# Altium PCB zbook-rf-shields-LORA-P1.PcbDoc
Units mm, origin at the board's own origin, x right, y up, seen from the top; angles counter-clockwise.
Board outline 27.5 x 35.5 mm, 2 copper layers (Top Layer, Bottom Layer), stack 0.97 mm thick; 22 components, 20 nets, 66 pads, 117 vias.
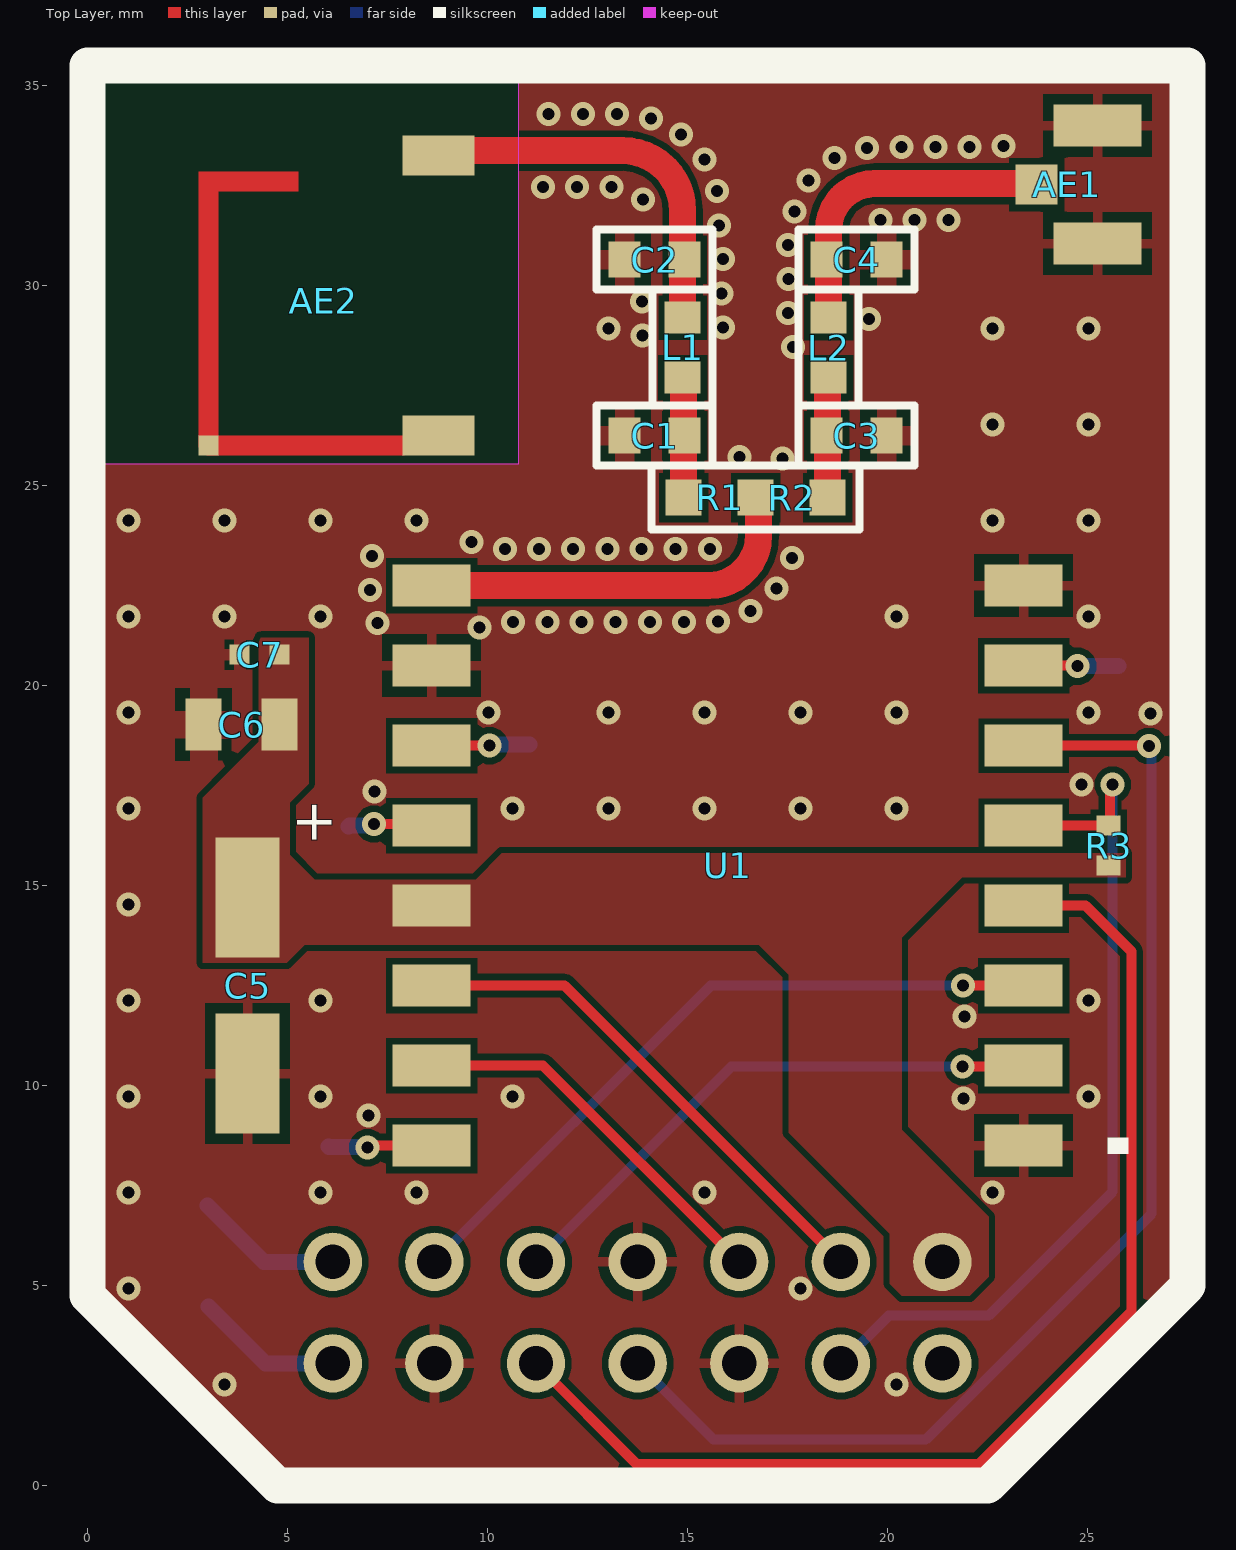
[diagram p0: Top Layer view]
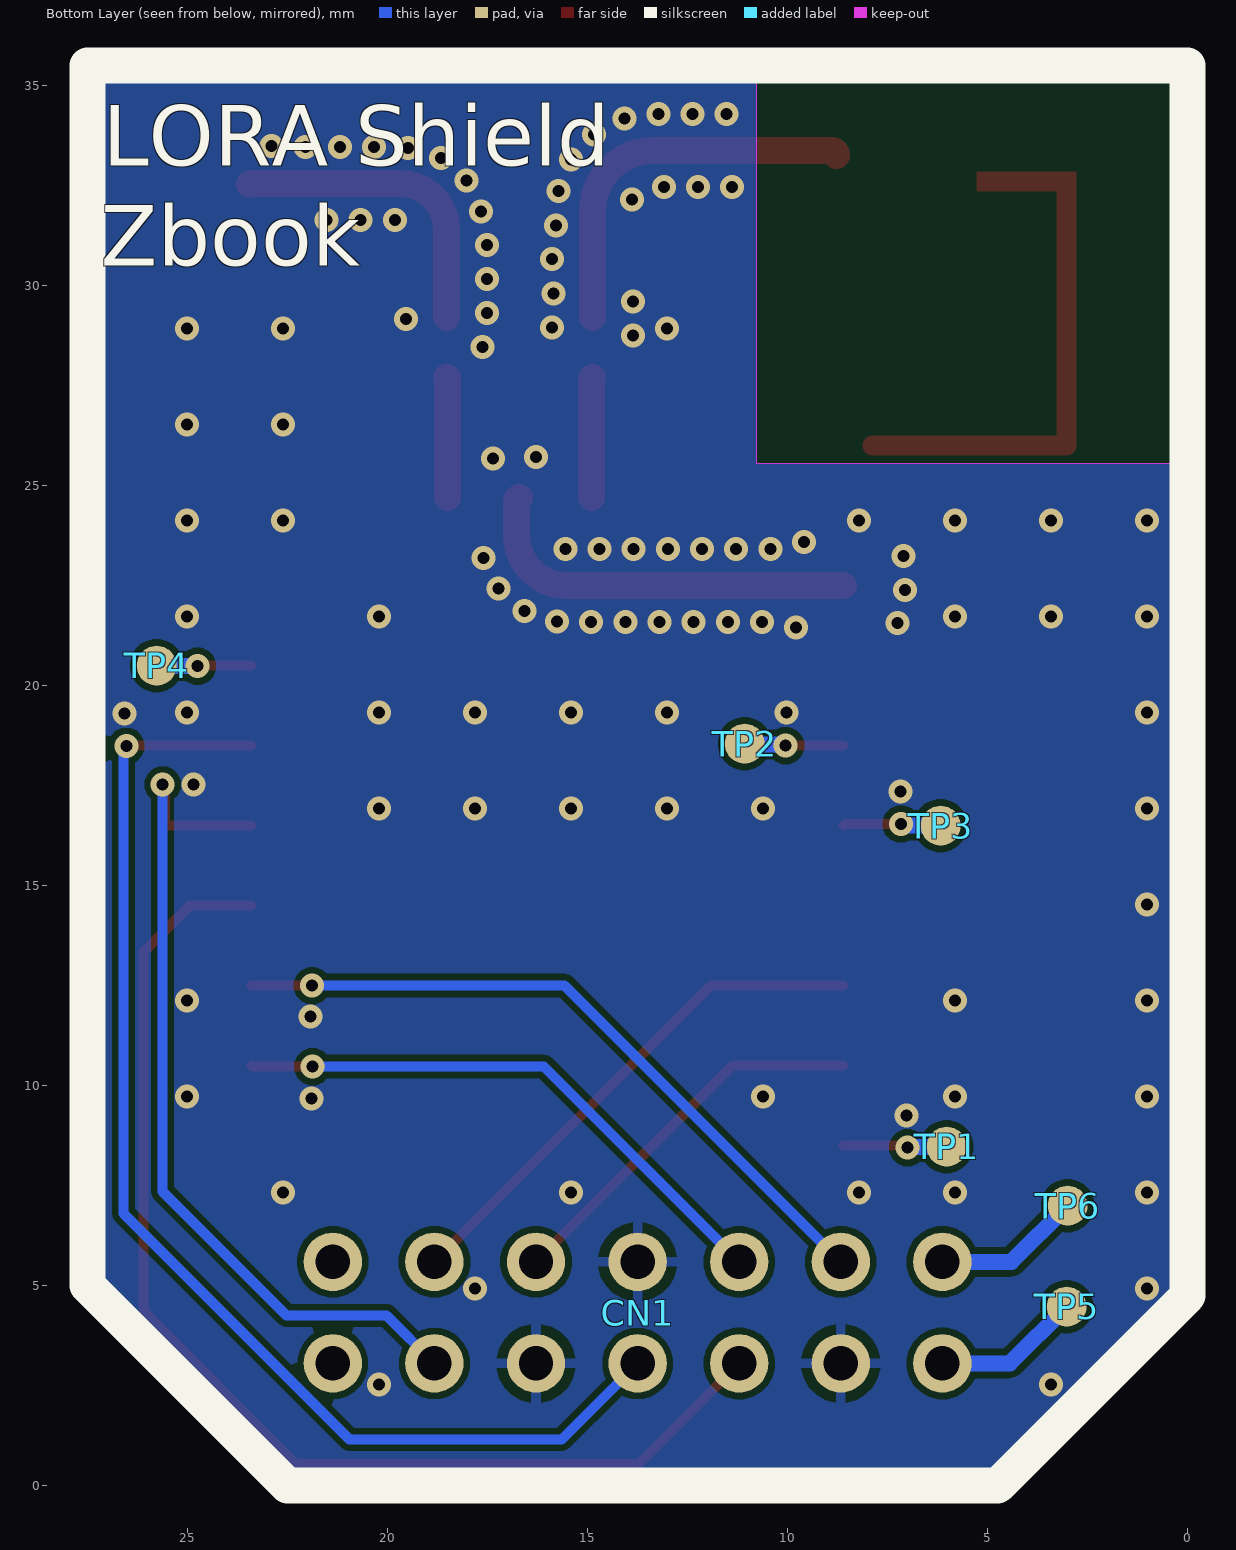
[diagram p1: Bottom Layer view, seen from below]
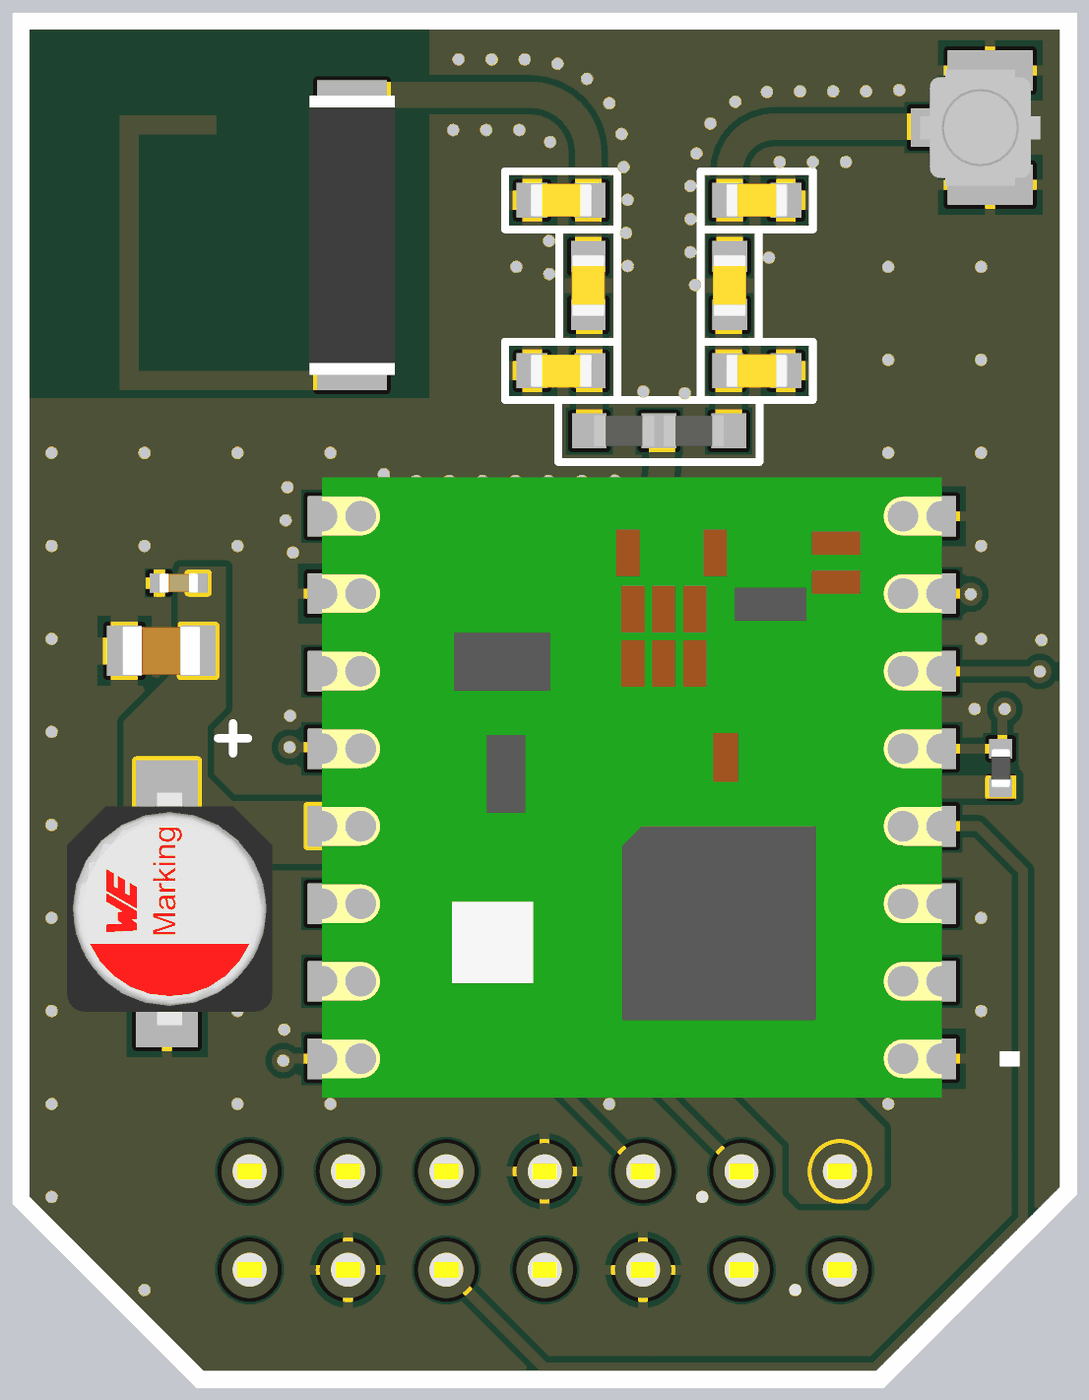
[diagram p2: 3D render of the assembled board from above, using the file's embedded part models]

## Layer stack, top to bottom
Top Solder: solder mask 0.0102, Solder Resist, Dk 3.5
Top Layer: signal copper 0.035
Dielectric 1: core 0.9, Core-043, Dk 4.3
Bottom Layer: signal copper 0.035
Bottom Solder: solder mask 0.0102, Solder Resist, Dk 3.5

## Board outline
4.75,0 22.5,0 27.5,5 27.5,35.5 0,35.5 0,4.75

## Design rules (kind name [scope] priority, off if disabled: settings)
Clearance Clearance_ANTKEEPOUT [IsKeepOut AND InComponent('AE*') vs (IsRegion AND InNet('GND')) OR IsFill] p1: gap=0 ignorepadtopadclearanceinfootprint=FALSE
Clearance [All] p2: gap=0.16 ignorepadtopadclearanceinfootprint=FALSE
ComponentClearance ComponentClearance_ANTRES [InComponent('R1') vs InComponent('R2')] p1: gap=-0.025 collisioncheckmode=3 verticalgap=2540 showdistances=FALSE
ComponentClearance TestPoints [HasFootprint('Test Point') vs HasFootprint('Test Point')] p2: gap=1.016 collisioncheckmode=3 verticalgap=0.254 showdistances=FALSE
ComponentClearance [All] p3: gap=0.254 collisioncheckmode=3 verticalgap=0.254 showdistances=FALSE
MinimumSolderMaskSliver [All] p1: minsoldermaskwidth=0.22
PolygonConnect "Relief 2312" [(HasFootprint('C2312') OR HasFootprint('R2312')OR HasFootprint('L2312')) AND IsPad vs IsPolygon] p1: thpad.connectstyle=Relief thpad.reliefconductorwidth=1.5 thpad.reliefentries=4 thpad.polygonreliefangle="90 Angle" thpad.airgapwidth=0.2 smdpad.connectstyle=Relief smdpad.reliefconductorwidth=1.5 smdpad.reliefentries=4 smdpad.polygonreliefangle="90 Angle" smdpad.airgapwidth=0.2 via.connectstyle=Direct via.reliefconductorwidth=0.254 via.reliefentries=4 via.polygonreliefangle="90 Angle" via.airgapwidth=0.254
PolygonConnect "Relief 1206" [(HasFootprint('C1206') OR HasFootprint('R1206') or HasFootprint('L1206')) AND IsPad vs IsPolygon] p2: thpad.connectstyle=Relief thpad.reliefconductorwidth=1.1 thpad.reliefentries=4 thpad.polygonreliefangle="90 Angle" thpad.airgapwidth=0.2 smdpad.connectstyle=Relief smdpad.reliefconductorwidth=1.1 smdpad.reliefentries=4 smdpad.polygonreliefangle="90 Angle" smdpad.airgapwidth=0.2 via.connectstyle=Direct via.reliefconductorwidth=0.254 via.reliefentries=4 via.polygonreliefangle="90 Angle" via.airgapwidth=0.254
PolygonConnect "Relief 0806" [(HasFootprint('C0805') OR HasFootprint('R0805') OR HasFootprint('L0805')) AND IsPad vs IsPolygon] p3: thpad.connectstyle=Relief thpad.reliefconductorwidth=0.7 thpad.reliefentries=4 thpad.polygonreliefangle="90 Angle" thpad.airgapwidth=0.254 smdpad.connectstyle=Relief smdpad.reliefconductorwidth=0.7 smdpad.reliefentries=4 smdpad.polygonreliefangle="90 Angle" smdpad.airgapwidth=0.254 via.connectstyle=Direct via.reliefconductorwidth=0.254 via.reliefentries=4 via.polygonreliefangle="90 Angle" via.airgapwidth=0.254
PolygonConnect "Relief 0603" [(HasFootprint('C0603') OR HasFootprint('R0603') OR HasFootprint('L0603')) AND IsPad vs IsPolygon] p4: thpad.connectstyle=Relief thpad.reliefconductorwidth=0.5 thpad.reliefentries=4 thpad.polygonreliefangle="90 Angle" thpad.airgapwidth=0.254 smdpad.connectstyle=Relief smdpad.reliefconductorwidth=0.5 smdpad.reliefentries=4 smdpad.polygonreliefangle="90 Angle" smdpad.airgapwidth=0.254 via.connectstyle=Direct via.reliefconductorwidth=0.254 via.reliefentries=4 via.polygonreliefangle="90 Angle" via.airgapwidth=0.254
PolygonConnect "Relief 0402" [(HasFootprint('C0402') OR HasFootprint('R0402') OR HasFootprint('L0402')) AND IsPad vs IsPolygon] p5: thpad.connectstyle=Relief thpad.reliefconductorwidth=0.3 thpad.reliefentries=4 thpad.polygonreliefangle="90 Angle" thpad.airgapwidth=0.127 smdpad.connectstyle=Relief smdpad.reliefconductorwidth=0.3 smdpad.reliefentries=4 smdpad.polygonreliefangle="90 Angle" smdpad.airgapwidth=0.127 via.connectstyle=Direct via.reliefconductorwidth=0.254 via.reliefentries=4 via.polygonreliefangle="90 Angle" via.airgapwidth=0.254
PolygonConnect [All] p6: thpad.connectstyle=Relief thpad.reliefconductorwidth=0.254 thpad.reliefentries=4 thpad.polygonreliefangle="90 Angle" thpad.airgapwidth=0.254 smdpad.connectstyle=Relief smdpad.reliefconductorwidth=0.254 smdpad.reliefentries=4 smdpad.polygonreliefangle="90 Angle" smdpad.airgapwidth=0.254 via.connectstyle=Direct via.reliefconductorwidth=0.254 via.reliefentries=4 via.polygonreliefangle="90 Angle" via.airgapwidth=0.254
ReturnPath ReturnPath_ANT [not ((IsTrack or IsArc) and (InNet('NetAE1_1')or InNet('NetAE2_1')) or (IsTrack and  InComponent('AE*')))] p1: impedanceprofileid={BA3A44C1-9B26-4D0D-B64A-AABC08649B74} _gaplimit=0 _useantipads=TRUE
RoutingVias [All] p1: holewidth=0.3 width=0.6 viastyle="Through Hole" minholewidth=0.3 minwidth=0.6 maxholewidth=5 maxwidth=1.5
SilkToSilkClearance SilkToSilkClearance_OVERLAY [OnLayer('Bottom Overlay') and IsText or IsTrack vs OnLayer('Bottom Overlay') and  IsTrack or IsText] p1: silktosilkclearance=-1
SilkToSilkClearance [All] p2: silktosilkclearance=0.254
SilkToSolderMaskClearance [IsPad] p1: minsilkscreentomaskgap=0.15 clearancetoexposedcopper=TRUE
SolderMaskExpansion [All] p1: expansion=0.102 istentingtop=FALSE
SupplyNets "Schematic Supply Nets_1" [InNet('+3V3')] p1: voltage=0.000
SupplyNets "Schematic Supply Nets" [InNet('GND')] p2: voltage=0.000
Width Width_ANT50 [InNetClass('IMP50')] p1: maxlimit=0.68 minlimit=0.68 preferedwidth=0.68 impedanceprofiledriven=TRUE impedanceprofileid={BA3A44C1-9B26-4D0D-B64A-AABC08649B74} impedanceprofilevalue=50.000000 minimp=50.000000 maximp=50.000000 favimp=50.000000
Width [All] p2: maxlimit=10 minlimit=0.15 preferedwidth=0.254
26 further rules are at their usual default settings.

## Classes and differential pairs
net class IMP50: NetAE1_1 NetAE2_1 NetC1_2 NetC3_2 NetR1_1

## Components (designator, comment, footprint, x,y, rotation, side; value= is the part's Value field where it differs from the comment)
AE1 "CONUFL001-SMD-T" LINX_CONUFL001-SMD-T 25.25,32.525 r270 top
AE2 "Antenna 915MHz" 0915AT43A0026 8.775,29.75 r270 top
C1 "TBD" C0603 14.175,26.25 r0 top
C2 "TBD" C0603 14.175,30.65 r0 top
C3 "TBD" C0603 19.225,26.25 r180 top
C4 "TBD" C0603 19.225,30.65 r180 top
C5 "47µF/10V" WCAP-PSLP_5X5.5(DXL) 4,12.5 r90 top
C6 "10µF/50V" C0805 3.85,19.025 r0 top value=10µF
C7 "1µF/50V" C0402 4.3,20.775 r0 top
CN1 "SAMTEC-SLW-107-01-X-D" SAMTEC-SLW-107-01-X-D 13.75,4.325 r0 bottom locked
L1 "TBD" L0603 14.875,28.45 r90 top
L2 "TBD" L0603 18.525,28.45 r90 top
R1 "0R" R0603 15.8,24.7 r180 top value=0Ω
R2 "0R" R0603 17.6,24.7 r180 top value=0Ω
R3 "5K" R0402 25.525,16 r270 top value=5kΩ
TP1 "TestPoint" "Test Point" 6.025,8.475 r90 bottom
TP2 "TestPoint" "Test Point" 11.075,18.55 r90 bottom
TP3 "TestPoint" "Test Point" 6.175,16.5 r90 bottom
TP4 "TestPoint" "Test Point" 25.775,20.5 r90 bottom
TP5 "TestPoint" "Test Point" 3.025,4.475 r90 bottom
TP6 "TestPoint" "Test Point" 3,7 r90 bottom
U1 "RFM95W-868S2" XCVR_RFM95W-868S2 16,15.5 r180 top locked

## Footprints (in the part's own frame and the unit in brackets; to place one, negate y for a bottom-side part, rotate by r counter-clockwise, add the part's x,y. Pads: shape width x height; smd on the part's side, far side on the other; paste and mask are expansions set on the pad)
0915AT43A0026 [mm]
  rect 1x1.8 smd: 1(-3.5,0) ""(3.5,0)
  rect 0.5x0.5 smd paste-2539.97 mask+0: ""(3.75,-5.75)
  Top Layer region: -3.1,-4 -2.6,-4 -2.6,-3.5 -3.1,-3.5
  Top Layer region: -3.1,-6 -2.6,-6 -2.6,-5.5 -3.1,-5.5
  Top Layer lines w0.5: -2.85,-3.75 -2.85,-5.75 3.75,-5.75 3.75,-0.9
  Keep-Out Layer region: -5.8,-9 4.2,-9 4.2,2 -5.8,2
  body extent -3.6,-1.1 3.6,1.1, height 0.9
C0402 [mm]
  rect 0.5x0.5 smd: 1(-0.5,0) 2(0.5,0)
  body extent -0.5,-0.25 0.5,0.25, height 0.51
C0603 [mm]
  rect 0.8x0.9 smd: 1(-0.75,0) 2(0.75,0)
  silkscreen extent -1.45,-0.75 1.45,0.75, body extent -0.8,-0.43 0.8,0.43, height 0.81
C0805 [mm]
  rect 0.9x1.3 smd: 1(-0.95,0) 2(0.95,0)
  body extent -1,-0.62 1,0.63, height 1
L0603 [mm]
  rect 0.8x0.9 smd: 1(-0.75,0) 2(0.75,0)
  silkscreen extent -1.45,-0.75 1.45,0.75, body extent -0.8,-0.43 0.8,0.43, height 0.81
LINX_CONUFL001-SMD-T [mm]
  rect 1x1.05 smd: 1(0,-1.525)
  rect 1.05x2.2 smd: 2(-1.475,0) 3(1.475,0)
  body extent -1.5,-1.8 1.5,1.3, height 1.31
R0402 [mm]
  rect 0.5x0.6 smd: 1(-0.5,0) 2(0.5,0)
  body extent -0.5,-0.25 0.5,0.25, height 0.41
R0603 [mm]
  rect 0.9x0.9 smd: 1(-0.9,0) 2(0.9,0)
  silkscreen extent -1.7,-0.8 1.7,0.8, body extent -0.78,-0.4 0.78,0.4, height 0.46
SAMTEC-SLW-107-01-X-D [mm]
  round 1.46 hole 0.86 mask+0: 1(-7.62,1.27) 2(-7.62,-1.27) 3(-5.08,1.27) 4(-5.08,-1.27) 5(-2.54,1.27) 6(-2.54,-1.27) 7(0,1.27) 8(0,-1.27) 9(2.54,1.27) 10(2.54,-1.27) 11(5.08,1.27) 12(5.08,-1.27) 13(7.62,1.27) 14(7.62,-1.27)
  body extent -8.89,-2.48 8.89,2.48, height 4.57
"Test Point" [mm]
  round 1 smd paste-1: 1(0,0)
WCAP-PSLP_5X5.5(DXL) [mm]
  rect 3x1.6 smd paste+0 mask+0.102: 1(2.2,0) 2(-2.2,0)
  body extent -3.14,-2.72 2.86,2.58, height 5.35
XCVR_RFM95W-868S2 [mm]
  rect 1.95x1.05 smd: 1(-7.4,7) 2(-7.4,5) 3(-7.4,3) 4(-7.4,1) 5(-7.4,-1) 6(-7.4,-3) 7(-7.4,-5) 8(-7.4,-7) 9(7.4,-7) 10(7.4,-5) 11(7.4,-3) 12(7.4,-1) 13(7.4,1) 14(7.4,3) 15(7.4,5) 16(7.4,7)
  silkscreen extent -10.01,6.81 -9.5,7.2, body extent -8,-8 8,8, height 1.8

## Part data
AE1: "RF CONN - U.FL/MHF1 Jack 50 Ohm PCB Surface Mount", Manufacturer 1="TE Connectivity", Package=None, .Mounting=SMD, Check_prices=https://www.snapeda.com/parts/CONUFL001-SMD-T/TE+Connectivity/view-part/?ref=eda, Manufacturer Part Number 1=CONUFL001-SMD-T, SnapEDA_Link=https://www.snapeda.com/parts/CONUFL001-SMD-T/TE+Connectivity/view-part/?ref=snap
AE2: library part 0915AT43A0026E, "RF ANT - 915MHZ  CHIP SOLDER SMD", Manufacturer="Johanson Manufactoring", Resistance=50R, Supplier Part Number 1=712-1535-1-ND, .PCBChecked="Alex Batista", .SCHChecked="Alex Batista", ComponentLink1Description=http://www.johansontechnology.com/images/stories/ip/rf-antennas/Antenna_0915AT43A0026_v2.pdf?src-supplier=Farnell, ComponentLink1URL=http://www.johansontechnology.com/images/stories/ip/rf-antennas/Antenna_0915AT43A0026_v2.pdf?src-supplier=Farnell, ComponentLink2Description=http://www.farnell.com/datasheets/1928701.pdf?src-supplier=Newark, ComponentLink2URL=http://www.farnell.com/datasheets/1928701.pdf?src-supplier=Newark, ComponentLink3Description=http://www.farnell.com/datasheets/1318299.pdf?src-supplier=Newark, ComponentLink3URL=http://www.farnell.com/datasheets/1318299.pdf?src-supplier=Newark, Manufacturer Part Number=0915AT43A0026E, Pricing 1="1=0.84000, 10=0.75200, 25=0.71400, 100=0.58650, 250=0.54824, 500=0.48450 (USD)", RoHS=Yes, Stock 1=21212, Supplier 1=Digi-Key
C1 C2 C3 C4: library part MLCC_0603, "MLCC - TBD 0603"
C5: library part WCAP-PSLP_5X5.5, "CAP - 47UF 20% 10V", Manufacturer 1="Würth Elektronik", Manufacturer Part Number 1=875105242006, Package=None, .Mounting=SMD, Availability=Unavailable, Price=None
C6: library part GRM21BR61H106KE43L, "MLCC - 10µF 50V X5R 0805 ±10%", Case/Package=0805, Dielectric=X5R, Dielectric Material=Ceramic, Manufacturer 1=Murata, Manufacturer Lifecycle Status="IN PRODUCTION", Max Operating Temperature=85°C, Min Operating Temperature=-55°C, Tolerance=10%, Voltage Rating=50V, .Mounting=SMT, Category="Ceramic Capacitors", ComponentLink1Description=https://datasheet.octopart.com:443/GRM21BR61H106KE43L-Murata-datasheet-155345082.pdf?src-supplier=Newark, ComponentLink1URL=https://datasheet.octopart.com:443/GRM21BR61H106KE43L-Murata-datasheet-155345082.pdf?src-supplier=Newark, ComponentLink2Description=https://datasheet.octopart.com:443/GRM21BR61H106KE43L-Murata-datasheet-141278272.pdf?src-supplier=Geoflip, ComponentLink2URL=https://datasheet.octopart.com:443/GRM21BR61H106KE43L-Murata-datasheet-141278272.pdf?src-supplier=Geoflip, ComponentLink3Description=https://datasheet.octopart.com:443/GRM21BR61H106KE43L-Murata-datasheet-165579666.pdf?src-supplier=TME, ComponentLink3URL=https://datasheet.octopart.com:443/GRM21BR61H106KE43L-Murata-datasheet-165579666.pdf?src-supplier=TME, ComponentLink4Description=https://datasheet.octopart.com:443/GRM21BR61H106KE43L-Murata-datasheet-140707579.pdf?src-supplier=Ciiva, ComponentLink4URL=https://datasheet.octopart.com:443/GRM21BR61H106KE43L-Murata-datasheet-140707579.pdf?src-supplier=Ciiva, ComponentLink5Description=https://datasheet.octopart.com:443/GRM21BR61H106KE43L-Murata-datasheet-138744880.pdf?src-supplier=Ciiva, ComponentLink5URL=https://datasheet.octopart.com:443/GRM21BR61H106KE43L-Murata-datasheet-138744880.pdf?src-supplier=Ciiva, ComponentLink6Description=https://datasheet.octopart.com/GRM21BR61H106KE43L-Murata-datasheet-12515295.pdf, ComponentLink6URL=https://datasheet.octopart.com/GRM21BR61H106KE43L-Murata-datasheet-12515295.pdf, ComponentLink7Description=https://datasheet.octopart.com/GRM21BR61H106KE43L-Murata-datasheet-12510076.pdf, ComponentLink7URL=https://datasheet.octopart.com/GRM21BR61H106KE43L-Murata-datasheet-12510076.pdf, ComponentLink8Description=https://datasheet.octopart.com/GRM21BR61H106KE43L-Murata-datasheet-11978611.pdf, ComponentLink8URL=https://datasheet.octopart.com/GRM21BR61H106KE43L-Murata-datasheet-11978611.pdf, ComponentLink9Description=https://datasheet.octopart.com/GRM21BR61H106KE43L-Murata-datasheet-10025737.pdf, ComponentLink9URL=https://datasheet.octopart.com/GRM21BR61H106KE43L-Murata-datasheet-10025737.pdf, ComponentLink10Description=https://datasheet.octopart.com/GRM21BR61H106KE43L-Murata-datasheet-8819587.pdf, ComponentLink10URL=https://datasheet.octopart.com/GRM21BR61H106KE43L-Murata-datasheet-8819587.pdf, ComponentLink11Description=http://sigma.octopart.com:80/reach_statement/Murata-company-16.pdf?src-supplier=Compliance+Statements, ComponentLink11URL=http://sigma.octopart.com:80/reach_statement/Murata-company-16.pdf?src-supplier=Compliance+Statements, Country of Origin="Japan, Mainland China, Philippines, Singapore, Thailand", Export Control Classification Number (ECCN) Code=EAR99, Harmonized Tariff Schedule (HTS) Code=8532.24.00.20, Height=1.25mm, Introduction Date=2018-09-13, Length=2mm, Lifecycle Status=Production, Manufacturer Part Number 1=GRM21BR61H106KE43L, Material=Ceramic, Mounting Technology="Surface Mount", Number of Terminals=2, Pricing="3000=0,05122, 6000=0,0502, 12000=0,04948, 24000=0,04878, 48000=0,04738 (USD)", REACH SVHC=Yes, RoHS=Compliant, Stock=525000, Supplier=Avnet, Supplier Part Number=GRM21BR61H106KE43L, Thickness=1.25mm, Voltage Rating (DC)=50V, Width=1.25mm
C7: library part MSASU105CB5105KFNA01, "MLCC - 1µF 50V X5R 0402 ±10%", Manufacturer 1="Taiyo Yuden", Manufacturer 2="Murata Electronics", Manufacturer Part Number 2=GRM155R61H105KE05D, Manufacturer Part Number 3=GRM155R61E105KA12D, Supplier Part Number=587-MSASU105CB5105KFNA01CT-ND, .Mounting=SMT, .PCBChecked="Lucas Vieira", .SCHChecked="Lucas Vieira", Category="Ceramic Capacitors", Manufacturer 3="Murata Electronics", Manufacturer Part Number 1=MSASU105CB5105KFNA01, Pricing="1=0,28, 10=0,184, 50=0,1288, 100=0,1041, 500=0,07732, 1000=0,06766, 2500=0,06444, 5000=0,05961 (USD)", Reach SVHC Compliant=Yes, RoHS=Yes, RoHS Compliant=Yes, Stock=15208, Supplier=Digikey, Supplier 1=Digikey, Supplier Part Number 1=587-MSASU105CB5105KFNA01CT-ND
CN1: "HEADER - 14 Position Receptacle Connector 0.100\" (2.54mm) Through Hole Gold", Manufacturer 1="Samtec Inc.", Package=None, .Mounting=PTH, Availability=Unavailable, Manufacturer Part Number 1=SAMTEC-SLW-107-01-X-D, Price=None
L1 L2: library part Inductor_0603, "INDUCTOR - TBD 0603"
R1 R2: library part RC0603FR-070RL, "RES - 0R 1/10W 0603", Case Code (Imperial)=0603, Current Rating=1A, Manufacturer 1="Yageo Group", Max Operating Temperature=155°C, Max Power Dissipation=100mW, Min Operating Temperature=-55°C, Temperature Coefficient=200ppm/°C, Tolerance=1%, Voltage Rating=75V, Voltage Rating (DC)=50V, .Mounting=SMD, Case/Package=0603, Category="Chip SMD Resistors", China RoHS=Non-Compliant, ComponentLink1Description=https://datasheet.octopart.com:443/RC0603FR-070RL-Yageo-datasheet-127823281.pdf?src-supplier=Upverter, ComponentLink1URL=https://datasheet.octopart.com:443/RC0603FR-070RL-Yageo-datasheet-127823281.pdf?src-supplier=Upverter, ComponentLink2Description=https://datasheet.octopart.com:443/RC0603FR-070RL-Yageo-datasheet-30459151.pdf?src-supplier=IHS, ComponentLink2URL=https://datasheet.octopart.com:443/RC0603FR-070RL-Yageo-datasheet-30459151.pdf?src-supplier=IHS, ComponentLink3Description=https://datasheet.octopart.com:443/RC0603FR-070RL-Yageo-datasheet-8328172.pdf?src-supplier=element14+APAC, ComponentLink3URL=https://datasheet.octopart.com:443/RC0603FR-070RL-Yageo-datasheet-8328172.pdf?src-supplier=element14+APAC, ComponentLink4Description=https://datasheet.octopart.com:443/RC0603FR-070RL-Yageo-datasheet-34211833.pdf?src-supplier=Newark, ComponentLink4URL=https://datasheet.octopart.com:443/RC0603FR-070RL-Yageo-datasheet-34211833.pdf?src-supplier=Newark, ComponentLink5Description=https://datasheet.octopart.com:443/RC0603FR-070RL-Yageo-Group-datasheet-176638170.pdf?src-supplier=Future+Electronics, ComponentLink5URL=https://datasheet.octopart.com:443/RC0603FR-070RL-Yageo-Group-datasheet-176638170.pdf?src-supplier=Future+Electronics, ComponentLink6Description=https://datasheet.octopart.com:443/RC0603FR-070RL-Yageo-datasheet-164759695.pdf?src-supplier=Future+Electronics, ComponentLink6URL=https://datasheet.octopart.com:443/RC0603FR-070RL-Yageo-datasheet-164759695.pdf?src-supplier=Future+Electronics, ComponentLink7Description=https://datasheet.octopart.com:443/RC0603FR-070RL-Yageo-datasheet-137700087.pdf?src-supplier=Future+Electronics, ComponentLink7URL=https://datasheet.octopart.com:443/RC0603FR-070RL-Yageo-datasheet-137700087.pdf?src-supplier=Future+Electronics, ComponentLink8Description=https://datasheet.octopart.com:443/RC0603FR-070RL-Yageo-datasheet-15599030.pdf?src-supplier=Future+Electronics, ComponentLink8URL=https://datasheet.octopart.com:443/RC0603FR-070RL-Yageo-datasheet-15599030.pdf?src-supplier=Future+Electronics, ComponentLink9Description=https://datasheet.octopart.com:443/RC0603FR-070RL-Yageo-datasheet-12596169.pdf?src-supplier=Future+Electronics, ComponentLink9URL=https://datasheet.octopart.com:443/RC0603FR-070RL-Yageo-datasheet-12596169.pdf?src-supplier=Future+Electronics, ComponentLink10Description=https://datasheet.octopart.com/RC0603FR-070RL-Yageo-datasheet-73766026.pdf, ComponentLink10URL=https://datasheet.octopart.com/RC0603FR-070RL-Yageo-datasheet-73766026.pdf, ComponentLink11Description=http://sigma.octopart.com:80/conflict_mineral_statement/Yageo-company-3.pdf?src-supplier=Compliance+Statements, ComponentLink11URL=http://sigma.octopart.com:80/conflict_mineral_statement/Yageo-company-3.pdf?src-supplier=Compliance+Statements, ComponentLink12Description=http://sigma.octopart.com:80/rohs_statement/Yageo-company-2.pdf?src-supplier=Compliance+Statements, ComponentLink12URL=http://sigma.octopart.com:80/rohs_statement/Yageo-company-2.pdf?src-supplier=Compliance+Statements, Composition="Thick Film", Contact Plating=Tin, Depth=800µm, Features="Moisture Resistant", Height=450µm, Lead Free="Lead Free", Length=1.6mm, Lifecycle Status=Production, Manufacturer Part Number 1=RC0603FR-070RL, Military Standard=Not, Mounting Technology="Surface Mount", Number of Terminals=2, Number of Terminations=2, Packaging="Tape & Reel", Pins=2, Power Rating=100mW, Pricing="1=0,101, 25=0,009, 100=0,008, 250=0,007, 500=0,006, 1000=0,005, 2500=0,004 (USD)", Radiation Hardening=No, REACH SVHC=Unaffected, RoHS=Compliant, Schedule B="8533210045, 8533210045|8533210045|8533210045|8533210045|8533210045", Stock=190618, Supplier=Avnet, Supplier Part Number=RC0603FR-070RL, Termination=SMD/SMT, Width=800µm, Working Voltage=75V
R3: library part RC0402FR-075KL, "RES - 5K 1/16W 0402 ±1%", Case/Package=0402, Manufacturer 1="Yageo Group", Max Operating Temperature=155°C, Max Power Dissipation=63mW, Min Operating Temperature=-55°C, Power Rating=62.5mW, Temperature Coefficient=100ppm/°C, Tolerance=1%, Voltage Rating=50V, .Mounting=SMD, Category="Chip SMD Resistors", China RoHS=Non-Compliant, ComponentLink1Description=https://datasheet.octopart.com:443/RC0402FR-075KL-Yageo-datasheet-127823281.pdf?src-supplier=Upverter, ComponentLink1URL=https://datasheet.octopart.com:443/RC0402FR-075KL-Yageo-datasheet-127823281.pdf?src-supplier=Upverter, ComponentLink2Description=https://datasheet.octopart.com:443/RC0402FR-075KL-Yageo-datasheet-137700087.pdf?src-supplier=IHS, ComponentLink2URL=https://datasheet.octopart.com:443/RC0402FR-075KL-Yageo-datasheet-137700087.pdf?src-supplier=IHS, ComponentLink3Description=https://datasheet.octopart.com:443/RC0402FR-075KL-Yageo-Group-datasheet-176638170.pdf?src-supplier=Future+Electronics, ComponentLink3URL=https://datasheet.octopart.com:443/RC0402FR-075KL-Yageo-Group-datasheet-176638170.pdf?src-supplier=Future+Electronics, ComponentLink4Description=https://datasheet.octopart.com:443/RC0402FR-075KL-Yageo-datasheet-164759695.pdf?src-supplier=Future+Electronics, ComponentLink4URL=https://datasheet.octopart.com:443/RC0402FR-075KL-Yageo-datasheet-164759695.pdf?src-supplier=Future+Electronics, ComponentLink5Description=https://datasheet.octopart.com:443/RC0402FR-075KL-Yageo-datasheet-175887523.pdf?src-supplier=Newark, ComponentLink5URL=https://datasheet.octopart.com:443/RC0402FR-075KL-Yageo-datasheet-175887523.pdf?src-supplier=Newark, ComponentLink6Description=https://datasheet.octopart.com/RC0402FR-075KL-Yageo-datasheet-73766026.pdf, ComponentLink6URL=https://datasheet.octopart.com/RC0402FR-075KL-Yageo-datasheet-73766026.pdf, ComponentLink7Description=http://sigma.octopart.com:80/conflict_mineral_statement/Yageo-company-3.pdf?src-supplier=Compliance+Statements, ComponentLink7URL=http://sigma.octopart.com:80/conflict_mineral_statement/Yageo-company-3.pdf?src-supplier=Compliance+Statements, ComponentLink8Description=http://sigma.octopart.com:80/rohs_statement/Yageo-company-2.pdf?src-supplier=Compliance+Statements, ComponentLink8URL=http://sigma.octopart.com:80/rohs_statement/Yageo-company-2.pdf?src-supplier=Compliance+Statements, Composition="Thick Film", Country of Origin="Mainland China, Taiwan", Export Control Classification Number (ECCN) Code=EAR99, Features="Moisture Resistant", Harmonized Tariff Schedule (HTS) Code=8533.21.00.30, Height=350µm, Introduction Date=2011-11-17, Length=1mm, Lifecycle Status=Production, Manufacturer Part Number 1=RC0402FR-075KL, Mounting Technology="Surface Mount", Number of Terminals=2, Number of Terminations=2, Pricing="1=0,101, 25=0,012, 100=0,009, 250=0,008, 500=0,007, 1000=0,006, 2500=0,005, 5000=0,004 (USD)", REACH SVHC=Yes, RoHS=Compliant, Schedule B="8533210045, 8533210045|8533210045|8533210045|8533210045|8533210045", Stock=9852, Supplier=Newark, Supplier Part Number=RC0402FR-075KL, Width=500µm, Working Voltage=50V
TP1 TP2 TP3 TP4 TP5 TP6: library part Test_Point, "MECH - Test Points"
U1: "MODULE - General ISM < 1GHz LoRaâ„¢ Transceiver Module 868MHz Antenna Not Included Surface Mount", Manufacturer 1=RF, Package="Non Standard RF Solutions", .Mounting=SMD, Availability="In Stock", Check_prices=https://www.snapeda.com/parts/RFM95W-868S2/RF+Solutions/view-part/?ref=eda, Manufacturer Part Number 1=RFM95W-868S2, Price=None, Purchase-URL=https://pricing.snapeda.com/search?q=RFM95W-868S2&ref=eda, SnapEDA_Link=https://www.snapeda.com/parts/RFM95W-868S2/RF+Solutions/view-part/?ref=snap

## Via types
v1: diameter 0.6, hole 0.3, Top Layer to Bottom Layer, tented both sides, 117 vias

## Nets (pads, with @x,y where several pads share a name; then routed paths per layer and width w, separated by ;. In a path a pad name is that pad's centre, name@x,y a point inside that pad or via, vN(x,y) a via of type N, cw(c..) or ccw(c..) an arc to the next point about the centre after c; other vN are vias at no path point)
+3V3: C5.1 C6.2 C7.2 CN1.14 R3.2 U1.13
CS: CN1.11 R3.1 U1.5 | length 21.9
  Top Layer w0.254: U1.5 R3.1 ; R3.1@25.562,16.5 25.562,17.462 v1(25.625,17.525)
  Bottom Layer w0.254: CN1.11 20.025,4.25 22.525,4.25 25.625,7.35 v1(25.625,17.525)
DONE_STATUS: CN1.12 U1.14 | length 13.1
  Top Layer w0.254: U1.14 11.925,12.5 CN1.12
GND: AE1.2 AE1.3 C1.1 C2.1 C3.1 C4.1 C5.2 C6.1 C7.1 CN1.3 CN1.8 CN1.9 U1.1 U1.8 U1.10
  other v1: 3.417,2.533 20.217,2.533 1.017,4.933 17.817,4.933 1.017,7.333 5.817,7.333 8.217,7.333 15.417,7.333 22.617,7.333 7.025,9.25 21.9,9.675 1.017,9.733 5.817,9.733 10.617,9.733 25.017,9.733 21.925,11.725 1.017,12.133 5.817,12.133 25.017,12.133 1.017,14.533 1.017,16.933 10.617,16.933 13.017,16.933 15.417,16.933 17.817,16.933 20.217,16.933 7.175,17.35 24.85,17.525 26.575,19.3 1.017,19.333 10.025,19.325 13.017,19.333 15.417,19.333 17.817,19.333 20.217,19.333 25.017,19.333 9.796,21.456 7.248,21.56 10.639,21.588 11.493,21.588 12.347,21.588 13.201,21.588 14.055,21.588 14.909,21.588 15.763,21.608 1.017,21.733 3.417,21.733 5.817,21.733 20.217,21.733 25.017,21.733 16.577,21.869 7.06,22.393 17.225,22.425 17.606,23.189 7.106,23.246 10.432,23.412 11.286,23.412 12.14,23.412 12.994,23.412 13.848,23.412 14.702,23.412 15.556,23.419 9.596,23.586 1.017,24.133 3.417,24.133 5.817,24.133 8.217,24.133 22.617,24.133 25.017,24.133 17.366,25.672 16.295,25.715 22.617,26.533 25.017,26.533 17.632,28.466 13.87,28.749 13.017,28.933 22.617,28.933 25.017,28.933 15.89,28.955 19.54,29.171 17.51,29.311 13.861,29.603 15.848,29.808 17.517,30.165 15.89,30.661 17.51,31.019 15.787,31.509 19.818,31.638 20.672,31.638 21.526,31.638 17.667,31.858 13.889,32.156 15.733,32.361 11.385,32.463 12.239,32.463 13.093,32.463 18.028,32.632 15.418,33.155 18.671,33.194 19.487,33.446 20.341,33.462 21.195,33.462 22.049,33.462 22.903,33.493 14.84,33.784 14.08,34.174 11.525,34.287 12.379,34.287 13.233,34.287
MISO: CN1.6 U1.2 | length 14.2
  Top Layer w0.254: v1(21.875,10.475) 23.375,10.475 U1.2
  Bottom Layer w0.254: CN1.6 16.09,10.475 v1(21.875,10.475)
MOSI: CN1.4 U1.3 | length 17.6
  Top Layer w0.254: v1(21.885,12.5) U1.3
  Bottom Layer w0.254: CN1.4 15.575,12.5 v1@21.875,12.5
NetAE1_1: AE1.1 C4.2 L2.2 | length 7.8
  Top Layer w0.68: L2.2 18.525,31.4 cw(c19.675,31.4) 19.675,32.55 23.425,32.55 cw(c23.425,32.525) AE1.1@23.45,32.525
NetAE2_1: AE2.1 C2.2 L1.2 | length 9.7
  Top Layer w0.68: AE2.1 cw(c8.9,33.25) 8.9,33.375 13.375,33.375 cw(c13.375,31.875) 14.875,31.875 L1.2
NetC1_2: C1.2 L1.1 R1.2 | length 3
  Top Layer w0.68: L1.1 cw(c14.875,27.675) 14.9,27.675 R1.2
NetC3_2: C3.2 L2.1 R2.1 | length 3
  Top Layer w0.68: R2.1 18.5,27.675 cw(c18.525,27.675) L2.1
NetCN1_1: CN1.1 TP5.1 | length 3.7
  Bottom Layer w0.4: TP5.1 4.445,3.055 CN1.1
NetCN1_2: CN1.2 TP6.1 | length 3.7
  Bottom Layer w0.4: TP6.1 4.405,5.595 CN1.2
NetR1_1: R1.1 R2.2 U1.9 | length 9.9
  Top Layer w0.68: U1.9 15.525,22.5 ccw(c15.525,23.75) 16.775,23.75 16.775,24.625 ccw(c16.7,24.625) R1.1
NetTP1_1: TP1.1 U1.16 | length 2.6
  Top Layer w0.254: v1(7,8.45) 7.05,8.5 U1.16
  Bottom Layer w0.4: TP1.1 6.037,8.463 6.988,8.463 v1(7,8.45)
NetTP2_1: TP2.1 U1.11 | length 2.4
  Top Layer w0.254: U1.11 v1@10,18.5
  Bottom Layer w0.254: v1(10.05,18.5) v1@10.075,18.525 ; TP2.1@11.05,18.525 TP2.1
  Bottom Layer w0.4: v1@10.075,18.525 TP2.1@11.05,18.525
NetTP3_1: TP3.1 U1.12 | length 2.1
  Top Layer w0.254: v1(7.163,16.538) 8.562,16.538 U1.12
  Bottom Layer w0.4: TP3.1@6.525,16.475 6.55,16.5 7.125,16.5 v1(7.163,16.538)
NetTP4_1: TP4.1 U1.7 | length 2.4
  Top Layer w0.254: U1.7 24.725,20.5 v1@24.75,20.475
  Bottom Layer w0.254: v1(24.751,20.486) v1@24.757,20.493 ; TP4.1@25.768,20.493 TP4.1
  Bottom Layer w0.4: v1@24.757,20.493 TP4.1@25.768,20.493
RESET: CN1.7 U1.6 | length 30.8
  Top Layer w0.254: U1.6 26.28,18.5 26.289,18.491 v1(26.534,18.491)
  Bottom Layer w0.254: CN1.7 15.655,1.15 20.95,1.15 26.6,6.8 26.6,18.425 v1(26.534,18.491)
SCK: CN1.5 U1.4 | length 29.7
  Top Layer w0.254: CN1.5 13.728,0.537 22.278,0.537 26.1,4.359 26.1,13.35 24.95,14.5 U1.4
TIMEOUT_FAULT: CN1.10 U1.15 | length 9.7
  Top Layer w0.254: U1.15 11.385,10.5 CN1.10
pads on no net: AE2. CN1.13

## Polygon pours and split planes (outlines as drawn)
GND on Top Layer "Top Layer-No Net" (solid, remove dead copper, pour order 4): -0.142,35.5 0.225,-0.05 27.5,-0.05 27.5,21.125 27.5,35.5
+3V3 on Top Layer "NONET_L01_P-001" (solid, remove dead copper, pour order 1): 4.325,21.2 5.525,21.2 5.525,17.55 5.05,17.075 5.05,15.775 5.675,15.15 9.7,15.15 10.356,15.806 25.95,15.806 25.95,15.21 21.86,15.21 20.35,13.7 20.35,8.9 22.525,6.725 22.525,5.225 22.05,4.75 20.35,4.75 20.05,5.05 20.05,6.3 17.525,8.825 17.525,12.775 16.775,13.525 5.425,13.525 4.975,13.075 2.875,13.075 2.875,17.2 3.775,18.1 4.275,18.6 4.275,21.775
GND on Bottom Layer "NONET_L01_P-001" (solid, remove dead copper, pour order 2): -0.141,35.5 27.5,35.5 27.5,-0.05 0.225,-0.05

## Keep-outs
Keep-Out Layer:
  the board outline again, w0.5

## Silkscreen, mask and mechanical layers (free items; w line width, h text height)
Top Overlay:
  the board outline again, w0.9
Bottom Overlay:
  the board outline again, w0.9
  text "LORA Shield" at 27.125,32.5 h2.6
  text "Zbook" at 27.175,29.998 h2.6
  text "https://github.com/zephyr-book/zbook-rf-shields" at 24.015,7.91 h2.6
Manufacturing Notes:
  drawing of 198 lines, arcs and shapes, not listed
  text "MANUFACTURING NOTES" at 78,200.5 h3
  text "BOARD INFO" at 128,193.584 h1.5
  text "FILES" at 79,192.976 h1.5
  text "GTO - Top Overlay" at 79,189.496 h1.5
  text "Minimum Track: 0.0762mm (3mil)" at 128,188.584 h1.5
  text "GTP - Top Paste" at 79,186.584 h1.5
  text "Minimum Clearance: 0.0762mm (3mil)" at 128,184.584 h1.5
  text "GTS - Top Solder" at 79,183.584 h1.5
  text "GTL - L1 (Positive)" at 79,180.584 h1.5
  text "Minimum Through Hole VIA: 0.6mm (23.62mil) (pad) / 0.3mm (11.8mil) (Drill)" at 128,180.5 h1.5
  text "G1  - L2 (Positive)" at 79,177.584 h1.5
  text "Drilling: L1-L4" at 128,176.584 h1.5
  text "G2  - L3 (Positive)" at 79,174.584 h1.5
  text "GBL - L4 (Positive)" at 79,171.584 h1.5
  text "RF TRACK ANTENNA (COPLANAR WAVEGUIDE):" at 128,169.584 h1.5
  text "GBS - Bottom Solder" at 79,168.584 h1.5
  text "GBP - Bottom Paste" at 79,165.584 h1.5
  text "Impedance Target: 50 ohm" at 128,165.584 h1.5
  text "GBO - Bottom Overlay" at 79,162.5 h1.5
  text "Track Width: 0.21mm (8.26mil)" at 128,161.584 h1.5
  text "GM3 - Manufacturing Notes" at 79,159.5 h1.5
  text "Gap: 0.15mm (5.90mil)" at 128,157.584 h1.5
  text "GM28 - Board Outline" at 79,156.5 h1.5
  text "Height(Reference L2): 0.11mm (4.33mil)" at 128,153.584 h1.5
  text "Dielectric Constant: 4.29" at 128,149.584 h1.5
  text "STACKUP BOARD" at 128,142.5 h2.5
  text "Board Layer Stack" at 129.77,138.31 h1.52
  text "Layer" at 158.21,138.31 h1.52
  text "Name" at 168.622,138.31 h1.52
  text "Material" at 192.237,138.31 h1.52
  text "Thickness" at 214.075,138.31 h1.52
  text "Constant" at 230.581,138.31 h1.52
  text "Top Overlay" at 168.622,135.262 h1.52
  text "Top Solder" at 168.622,132.214 h1.52
  text "Solder Resist" at 192.237,132.214 h1.52
  text "0,010mm" at 214.075,132.214 h1.52
  text "3.5" at 230.581,132.214 h1.52
  text "1" at 158.21,129.166 h1.52
  text "Top Layer" at 168.622,129.166 h1.52
  text "0,035mm" at 214.075,129.166 h1.52
  text "Dielectric 1" at 168.622,126.118 h1.52
  text "Core-043" at 192.237,126.118 h1.52
  text "0,900mm" at 214.075,126.118 h1.52
  text "4.3" at 230.581,126.118 h1.52
  text "2" at 158.21,123.07 h1.52
  text "Bottom Layer" at 168.622,123.07 h1.52
  text "0,035mm" at 214.075,123.07 h1.52
  text "Bottom Solder" at 168.622,120.022 h1.52
  text "Solder Resist" at 192.237,120.022 h1.52
  text "0,010mm" at 214.075,120.022 h1.52
  text "3.5" at 230.581,120.022 h1.52
  text "Bottom Overlay" at 168.622,116.974 h1.52
  text "'.TitleProject'" at 177.495,104.584 h1.5
  text "'.VersionRevision'" at 211.495,104.584 h1.5
  text "'.Company'" at 177.495,100.584 h1.5
  text "'.VariantName'" at 177.495,96.584 h1.5
Drill Drawing:
  circle w0.254: c178.365,85.49 r0.847
  lines w0.254: 177.519,88.453 179.212,88.453 179.212,90.146 177.519,90.146 177.519,88.453
  lines w0.381: 176,83.5 356.85,83.5 ; 176,91.12 356.85,91.12 ; 189.992,79.69 189.992,94.93 ; 204.72,79.69 204.72,94.93 ; 233.16,79.69 233.16,94.93 ; 246.009,79.69 246.009,94.93 ; 264.648,79.69 264.648,94.93 ; 302.736,79.69 302.736,94.93 ; 317.719,79.69 317.719,94.93 ; 336.662,79.69 336.662,94.93 ; 176,79.69 356.85,79.69 356.85,94.93 176,94.93 176,79.69
  text "Symbol" at 178.286,92.263 h1.83
  text "Count" at 191.135,92.263 h1.83
  text "Hole Size" at 205.863,92.263 h1.83
  text "Plated" at 234.303,92.263 h1.83
  text "Hole Type" at 247.152,92.263 h1.83
  text "Drill Layer Pair" at 265.791,92.263 h1.83
  text "Via/Pad" at 303.879,92.263 h1.83
  text "Pad Shape" at 318.862,92.263 h1.83
  text "Template" at 337.805,92.263 h1.83
  text "14" at 191.135,88.453 h1.52
  text "0,860mm (33,86mil)" at 205.863,88.453 h1.52
  text "PTH" at 234.303,88.453 h1.52
  text "Round" at 247.152,88.453 h1.52
  text "Top Layer - Bottom Layer" at 265.791,88.453 h1.52
  text "Pad" at 303.879,88.453 h1.52
  text "Rounded" at 318.862,88.453 h1.52
  text "(Mixed)" at 337.805,88.453 h1.52
  text "117" at 191.135,84.643 h1.52
  text "0,300mm (11,81mil)" at 205.863,84.643 h1.52
  text "PTH" at 234.303,84.643 h1.52
  text "Round" at 247.152,84.643 h1.52
  text "Top Layer - Bottom Layer" at 265.791,84.643 h1.52
  text "Via" at 303.879,84.643 h1.52
  text "Rounded" at 318.862,84.643 h1.52
  text "v60h30m0mx0" at 337.805,84.643 h1.52
  text "131 Total" at 191.135,80.833 h1.52
Board Outline:
  the board outline again, w0.1

## Text inside footprints (layer, text, board x,y; h text height)
C5: Top Overlay "+" at 6.1,16 h1.02 r90